# Altium PCB nfc-epd.PcbDoc (part 1 of 2)
Units mil, origin at the board's own origin, x right, y up, seen from the top; angles counter-clockwise.
Board outline 3332.68 x 2086.61 mil, 4 copper layers (Top Layer, Groud Plane, Signal 1, Bottom Layer); 142 components, 114 nets, 463 pads, 109 vias.
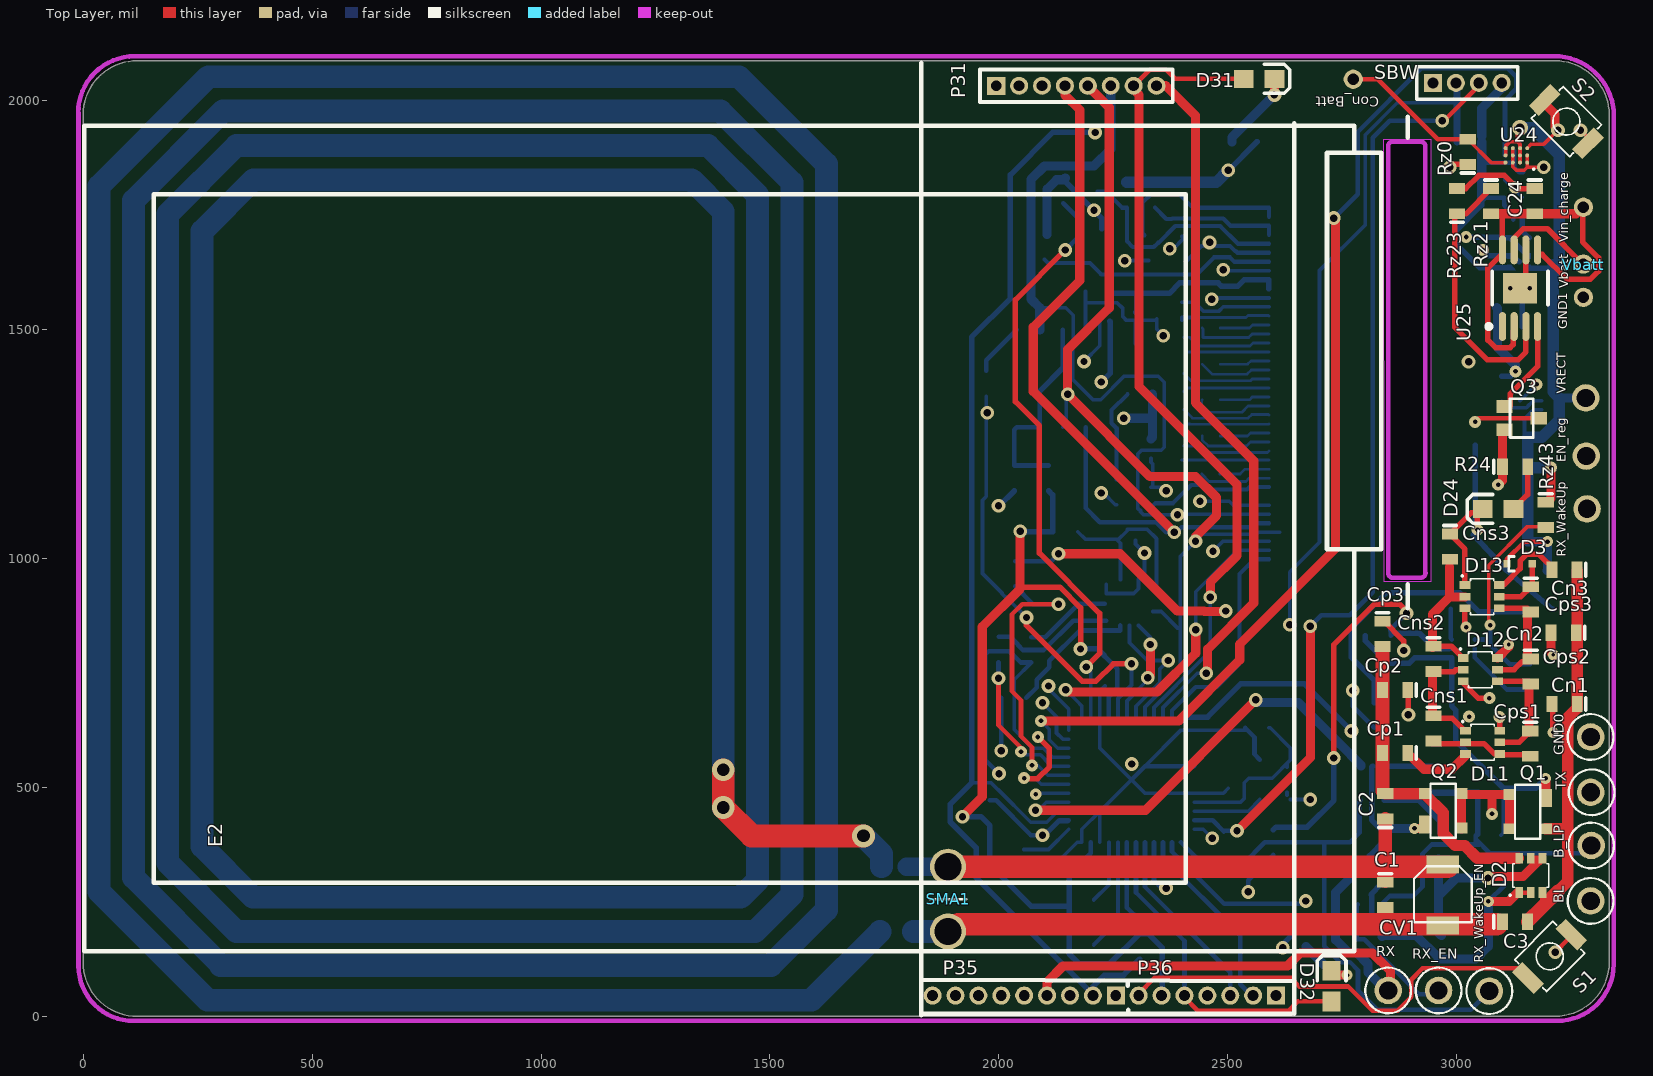
[diagram p0: Top Layer view]
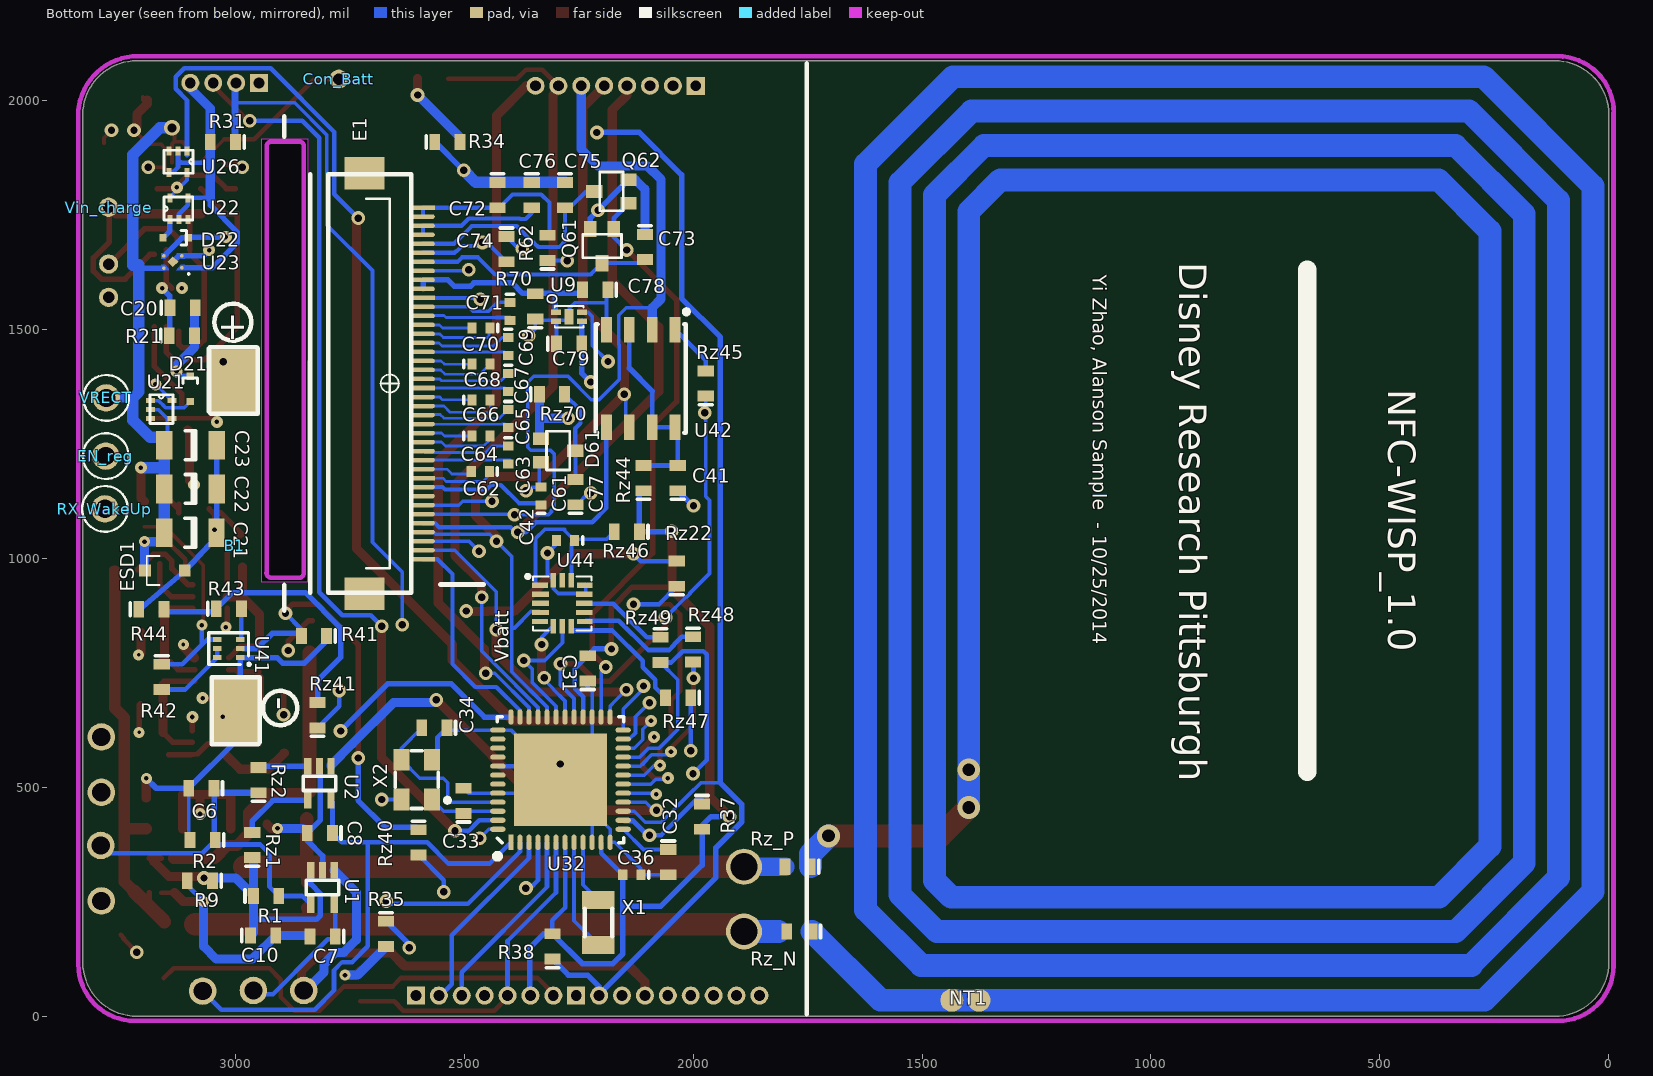
[diagram p1: Bottom Layer view, seen from below]
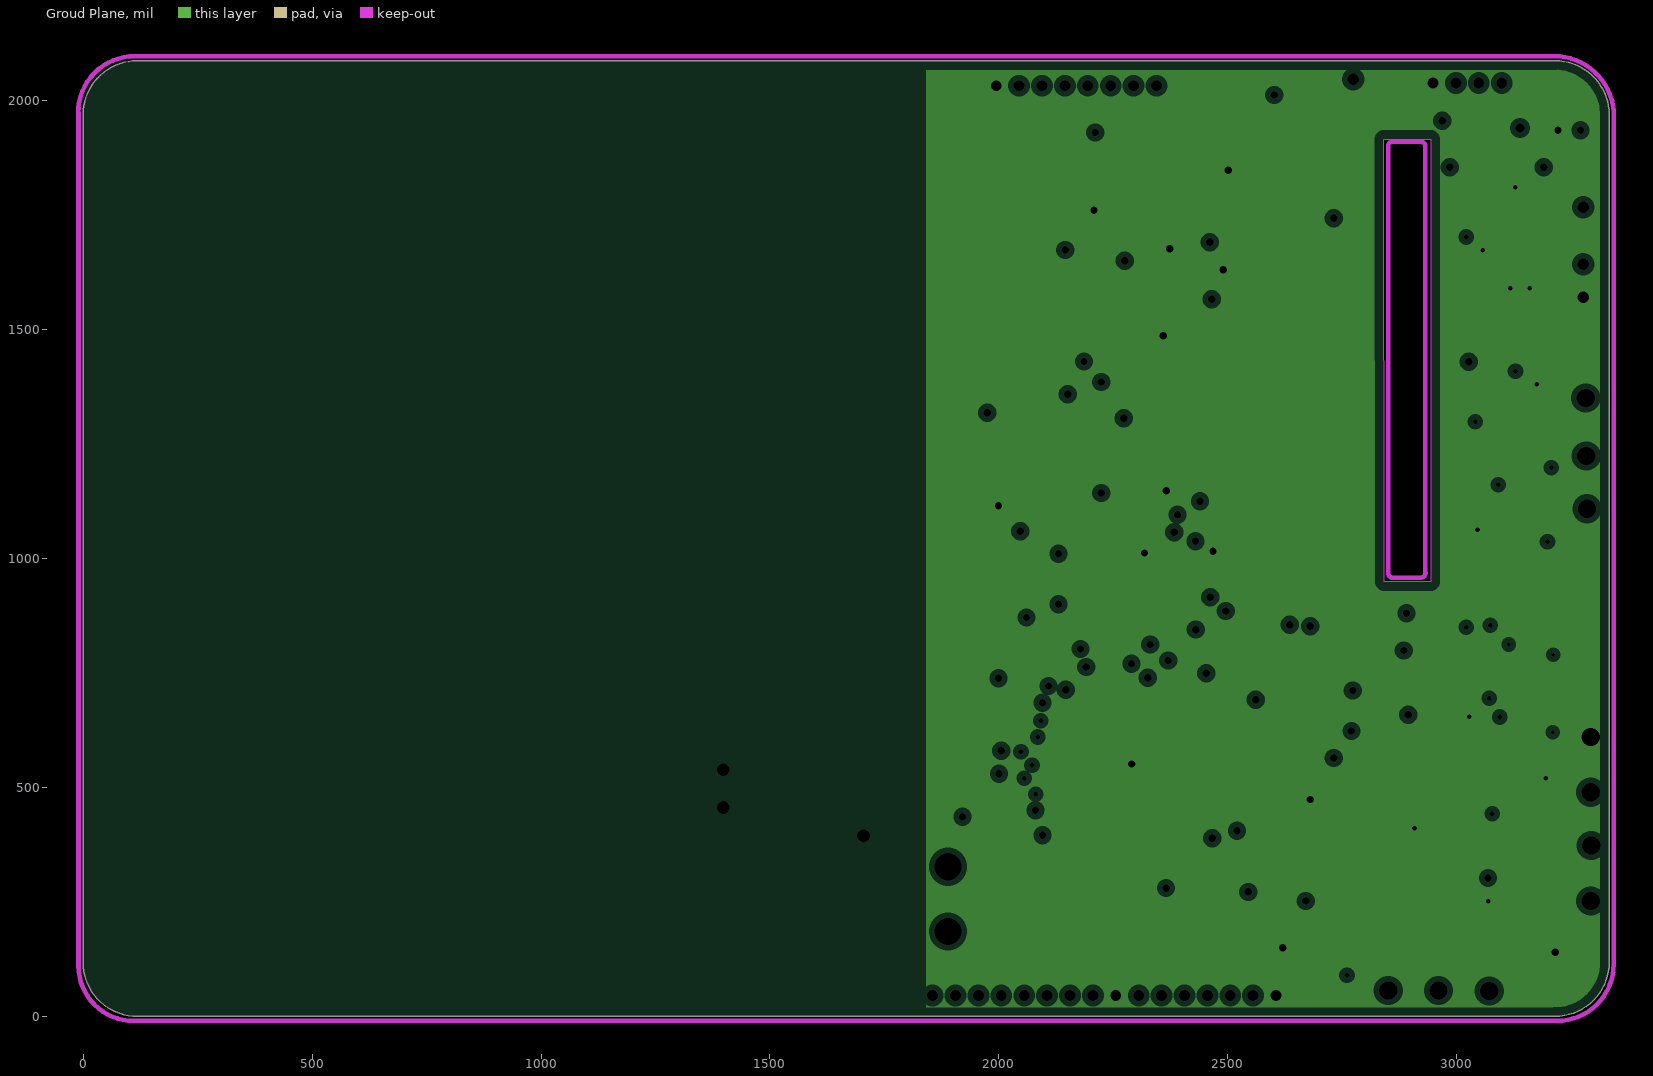
[diagram p2: Groud Plane, clearances drawn from the general rule]
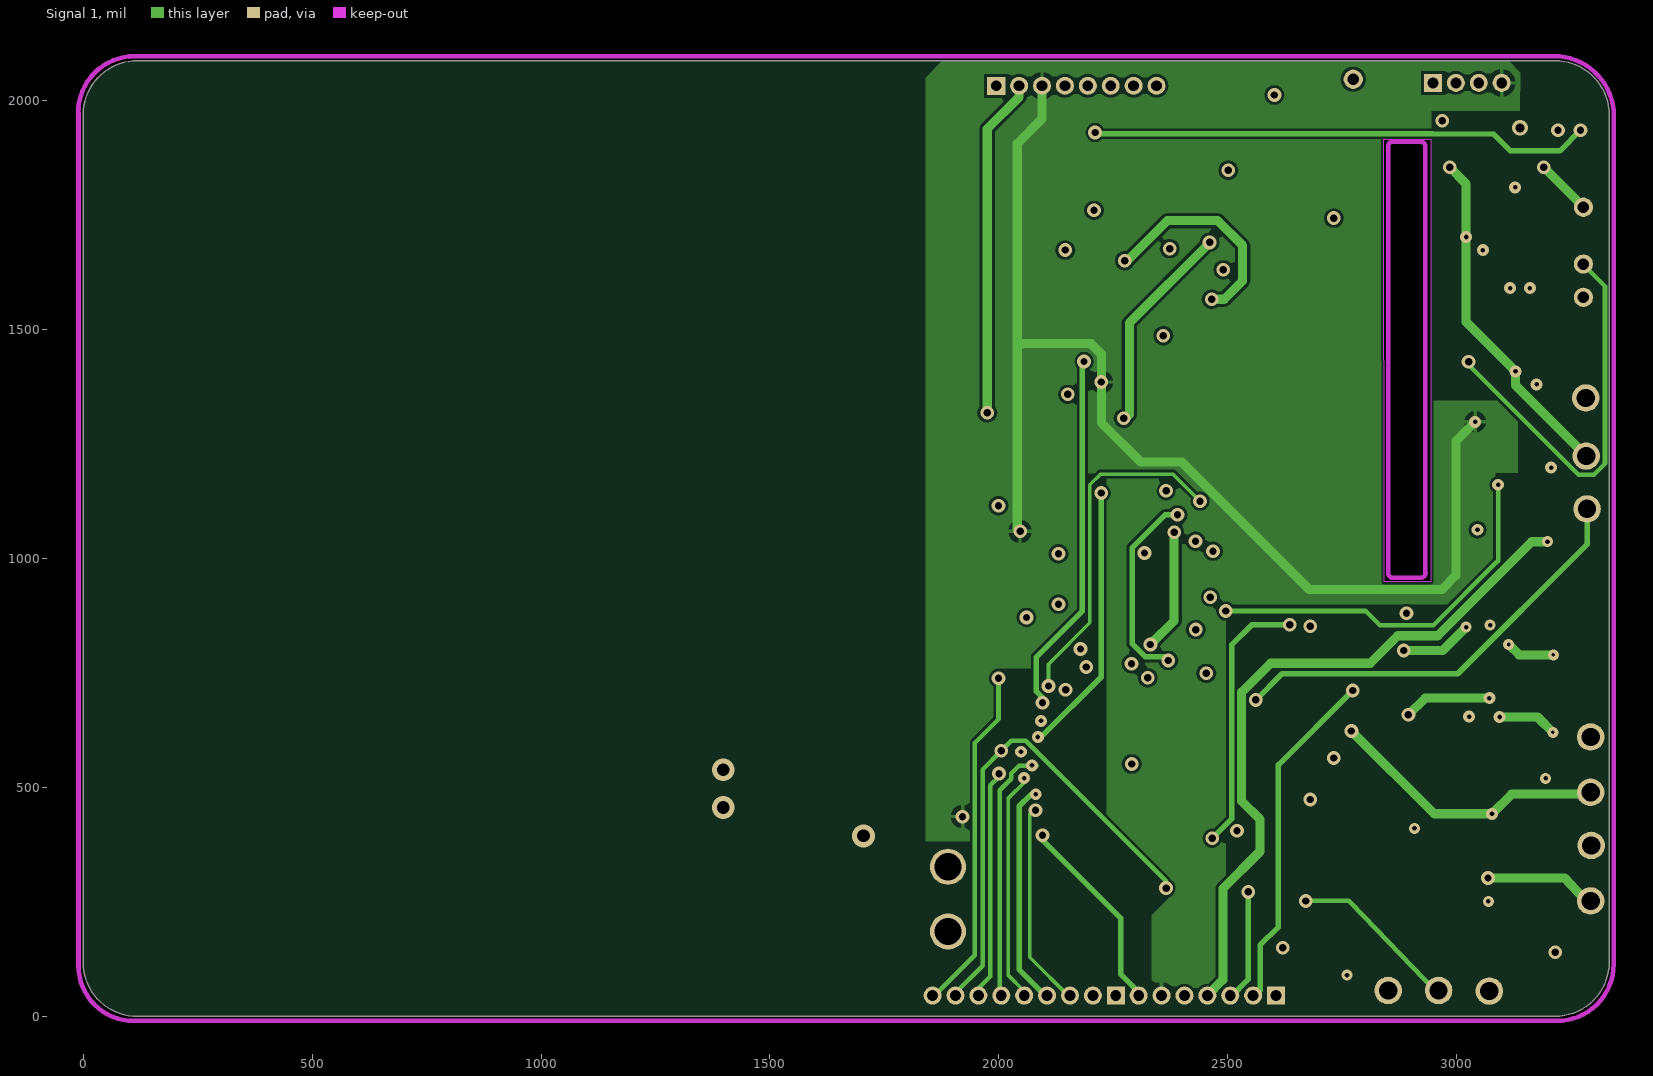
[diagram p3: Signal 1]

## Layer stack, top to bottom
Top Solder: solder mask 0.4, Solder Resist, Dk 3.5
Top Layer: signal copper 1.4
Dielectric1: core 12.6, FR-4, Dk 4.8
Groud Plane: plane copper 1.417, net GND
Dielectric2: prepreg 12.6, FR-4, Dk 4.8
Signal 1: signal copper 1.4
Dielectric3: core 12.6, FR-4, Dk 4.8
Bottom Layer: signal copper 1.4
Bottom Solder: solder mask 0.4, Solder Resist, Dk 3.5

## Board outline
0,118.11 0,1968.5 cw(c118.11,1968.5) 118.11,2086.61 3214.57,2086.61 cw(c3214.57,1968.5) 3332.68,1968.5 3332.68,118.11 cw(c3214.57,118.11) 3214.57,0 118.11,0 cw(c118.11,118.11)
cut-out: 2840.55,1915.35 2942.76,1915.35 2942.76,948.82 2841.55,948.82

## Design rules (kind name [scope] priority, off if disabled: settings)
Clearance "Clearance~Sunstone Circuits" [All] p1: gap=6 // Sunstone Circuits Minimum Clearance Rule (MLB~4&6 Layer Designs)
HoleSize "HoleSize~Sunstone Circuits" [All] p1: absolutevalues=TRUE maxlimit=251 minlimit=8 maxpercent=80.000 minpercent=20.000 // Sunstone Circuits Hole Size Rule (MLB~4&6 Layer Designs)
HoleSize Testpoint [All] p2: absolutevalues=TRUE maxlimit=100 minlimit=1 maxpercent=80.000 minpercent=20.000
HoleSize TestPointUsage [All] p3: absolutevalues=TRUE maxlimit=100 minlimit=1 maxpercent=80.000 minpercent=20.000
MinimumAnnularRing "MinimumAnnularRing~Sunstone Circuits" [All] p1: minimumring=7 // Sunstone Circuits Minimum Annular Ring (MLB~4&6 Layer Designs)
PlaneClearance "PlaneClearance~Sunstone Circuits" [All] p1: clearance=12 // Sunstone Circuits Power Plane Clearance Rule (MLB~4&6 Layer Designs)
PlaneConnect "PlaneConnect~Sunstone Circuits" [All] p1: planeconnectstyle=Relief reliefexpansion=10 reliefentries=4 reliefconductorwidth=8 reliefairgap=10 // Sunstone Circuits Power Plane Connect Rule (MLB~4&6 Layer Designs)
PolygonConnect "PolygonConnect~Sunstone Circuits" [All] p1: connectstyle=Relief reliefconductorwidth=8 reliefentries=4 polygonreliefangle="90 Angle" airgapwidth=10 // Sunstone Circuits Polygon Connect Style (MLB~4&6 Layer Designs)
RoutingVias "RoutingVias~Sunstone Circuits" [All] p1: holewidth=16 width=30 viastyle="Through Hole" minholewidth=8 minwidth=24 maxholewidth=20 maxwidth=40 // Sunstone Circuits Routing Vias Rule (MLB~4&6 Layer Designs)
ShortCircuit "ShortCircuit~Sunstone Circuits" [All] p1: allowed=FALSE // Sunstone Circuits Short Circuit Rule~Do Not Allow (MLB~4&6 Layer Designs)
SolderMaskExpansion "SolderMaskExpansion~Sunstone Circuits" [All] p1: expansion=3 // Sunstone Circuits Solder Mask Expansion Rule (MLB~4&6 Layer Designs)
ViasUnderSMD "ViasUnderSMD~Sunstone Circuits" [All] p1: allowed=FALSE // Sunstone Circuits Vias Under SMD~Do Not Allow (MLB~4&6 Layer Designs)
Width "Width~Sunstone Circuits" [All] p1: maxlimit=100 minlimit=6 preferedwidth=10 // Sunstone Circuits Minimum Width Rule (MLB~4&6 Layer Designs)
26 further rules are at their usual default settings.

## Classes and differential pairs
component class Sensors: C41 C42 R41 R42 R43 R44 Rz40 Rz41 Rz43 Rz44 Rz45 Rz46 Rz47 Rz48 Rz49 U41 U42 U44
component class AFE: B_LP BL C1 C2 C3 C6 C7 C8 C10 Cn1 Cn2 Cn3 Cns1 Cns2 Cns3 Cp1 Cp2 Cp3 Cps1 Cps2 Cps3 CV1 D2 D3 D11 D12 D13 GND0 NT1 Q1 Q2 R1 R2 R9 RX RX_EN RX_WakeUp RX_WakeUp_EN Rz1 Rz2 Rz_N Rz_P SMA1 Tx U1 U2 VRECT
component class Power: B1 C20 C21 C22 C23 C24 Con_Batt D21 D22 D24 EN_reg ESD1 GND1 Q3 R21 R24 Rz0 Rz21 Rz22 Rz23 U21 U22 U23 U24 U25 U26 Vbatt Vin_charge VinCharge
component class "E-ink Diplay": C61 C62 C63 C64 C65 C66 C67 C68 C69 C70 C71 C72 C73 C74 C75 C76 C77 C78 C79 D61 E1 E2 Q61 Q62 R62 R70 Rz70 U9
component class Digital: C31 C32 C33 C34 C36 D31 D32 P31 P35 P36 R31 R34 R35 R37 R38 S1 S2 SBW U32 X1 X2

## Components (designator, comment, footprint, x,y, rotation, side; value= is the part's Value field where it differs from the comment)
B1 "Battery -PGEB0054018" "Battery -PGEB0054018-Pad_only" 3023.62,1805.12 r270 bottom locked
B_LP "Test Point" "Test Point - Small"#1 3293.31,373.03 r0 top locked
BL "Test Point" "Test Point - Small"#1 3292.13,251.97 r0 top locked
C1 "Cap" 0603 2843.5,265 r270 top locked
C2 "Cap" 0603 2843.5,458.66 r90 top locked
C3 "Cap" 0603 3126.97,206.69 r0 top locked
C6 "Cap" 0603 3073.82,498.03 r0 bottom locked
C7 "Cap" 0603 2809.06,174.21 r0 bottom locked
C8 "Cap" 0603 2814.96,400.59 r0 bottom locked
C10 "Cap" 0603 2938.98,176.18 r180 bottom locked
C20 "Cap" 0603 3114.75,1547.24 r180 bottom locked
C21 "Cap" 1206 3097.76,1056.1 r0 bottom locked
C22 "Cap" 1206 3097.44,1151.57 r0 bottom locked
C23 "Cap" 1206 3097.44,1247.05 r0 bottom locked
C24 "Cap" 0603 3170,1780 r270 top locked
C31 "Cap" 0603 2230,760 r90 bottom locked
C32 "Cap" 0603 2054.13,336.61 r270 bottom locked
C33 "Cap" 0603 2500.98,470.47 r90 bottom locked
C34 "Cap" 0603 2564.96,629.92 r0 bottom locked
C36 "Cap" 0402 2133.86,309.06 r0 bottom locked
C41 "Cap" 0603 2033.46,1175.2 r90 bottom locked
C42 "Cap" 0402 2278.54,1039.37 r0 bottom locked
C61 "Cap" 0402 2332.02,1135.83 r90 bottom locked
C62 "Cap" 0402 2464.67,1190 r0 bottom locked
C63 "Cap" 0402 2403.54,1226.12 r270 bottom locked
C64 "Cap" 0402 2463.54,1267.12 r180 bottom locked
C65 "Cap" 0402 2403.54,1305.12 r270 bottom locked
C66 "Cap" 0402 2463.54,1346.12 r180 bottom locked
C67 "Cap" 0402 2403.54,1384.12 r270 bottom locked
C68 "Cap" 0402 2463.54,1424.12 r180 bottom locked
C69 "Cap" 0402 2403.54,1463.12 r270 bottom locked
C70 "Cap" 0402 2463.54,1503.12 r0 bottom locked
C71 "Cap" 0402 2399.61,1539.37 r270 bottom locked
C72 "Cap" 0603 2427.17,1793.31 r270 bottom locked
C73 "Cap" 0603 2105.12,1680 r270 bottom locked
C74 "Cap" 0603 2407.48,1675.2 r270 bottom locked
C75 "Cap" 0603 2279.53,1793.31 r270 bottom locked
C76 "Cap" 0603 2352.36,1793.31 r270 bottom locked
C77 "Cap" 0603 2256.89,1144.69 r90 bottom locked
C78 "Cap" 0603 2213.58,1586.61 r0 bottom locked
C79 "Cap" 0603 2270.67,1468.5 r180 bottom locked
Cn1 "Cap" 0603 3235.24,682.09 r180 top locked
Cn2 "Cap" 0603 3233.19,837.6 r180 top locked
Cn3 "Cap" 0603 3235,975 r180 top locked
Cns1 "Cap" 0603 2948.82,628.94 r270 top locked
Cns2 "Cap" 0603 2948.82,780.51 r270 top locked
Cns3 "Cap" 0603 2984.83,1025.59 r270 top locked
Con_Batt "Test Point" "Test Point - Super Small"#1 2773.62,2046.26 r180 bottom locked
Cp1 "Cap" 0603 2865.16,574.8 r180 top locked
Cp2 "Cap" 0603 2865.16,712.6 r180 top locked
Cp3 "Cap" 0603 2837.6,835 r270 top locked
Cps1 "Cap" 0603 3160.43,595.47 r270 top locked
Cps2 "Cap" 0603 3161.42,752.95 r270 top locked
Cps3 "Cap" 0603 3161.42,910.43 r270 top locked
CV1 "GKY40056" "Var-Cap - GKY40056" 2969.49,264.76 r90 top
D2 "BAS70BRW" SOT-363 3161.42,307.62 r90 top locked
D3 "RB751S40T1" SOD-523 3136.81,988.19 r90 top locked
D11 "BAS70DW-04" SOT-363 3056.1,598.43 r0 top locked
D12 "BAS70DW-04" SOT-363 3051.18,756.89 r0 top locked
D13 "BAS70DW-04" SOT-363 3055.12,916.34 r0 top locked
D21 "RB751S40T1" SOD-523 3097.83,1370 r180 bottom locked
D22 "RB751S40T1" SOD-523 3130,1700 r270 bottom locked
D24 "LED" "Diode - 0603" 3090,1108.06 r0 top locked
D31 "LED" "DIODE - 0603" 2567.91,2047.24 r180 top locked
D32 "LED" "DIODE - 0603" 2726.38,65.94 r270 top locked
D61 "BAT54SW" "SOT-323 / SC-70" 2294.62,1235.24 r270 bottom locked
E1 "EPD - Connector" "EPD - Connector" 2662.4,1381.89 r0 bottom locked
E2 "EPD - 2.7\"" "EPD - EM027AS012" 3198.82,1381.89 r180 top locked
EN_reg "Test Point" "Test Point - Small"#1 3282.48,1223.43 r90 bottom locked
ESD1 "MM3Z5V6B" SOD-323 3153.54,973.43 r90 bottom locked
GND0 "GND" "Test Point - Small"#1 3292.13,610 r0 top locked
GND1 "GND" "Test Point - Super Small"#1 3276.28,1570 r90 top locked
NT1 "PCB Coil" "Net Tie - 50mil" 1404.91,35 r0 bottom locked net-tie
P31 "MHDR1X8" MHDR1X8 1994.09,2032.01 r0 top locked
P35 "MHDR1X9" MHDR1X9 2255.12,45.34 r180 top locked
P36 "MHDR1X7" MHDR1X7 2605.12,45.34 r180 top locked
Q1 "BF1105R" SOT-143R 3154.53,446.85 r90 top locked
Q2 "BF1105R" SOT-143R 2970,448.82 r270 top locked
Q3 "NMOS" "SOT-323 / SC-70" 3141.33,1306.1 r270 top locked
Q61 "2N7002KW" "SOT-323 / SC-70" 2198.82,1682.09 r0 bottom locked
Q62 "2N7002KW" "SOT-323 / SC-70" 2178.15,1801.18 r90 bottom locked
R1 "Res" 0603 2932.09,262.8 r180 bottom locked
R2 "Res" 0603 3070.87,385 r0 bottom locked
R9 "Res" 0603 3076.77,296.26 r0 bottom locked
R21 "Res" 0603 3116.23,1486.22 r180 bottom locked
R24 "Res" 0603 3127.03,1200 r0 top locked
R31 "Res" 0603 3026.57,1909.45 r0 bottom locked
R34 "Res" 0603 2536.42,1909.45 r180 bottom locked
R35 "Res" 0603 2670.28,180.12 r270 bottom locked
R37 "Res" 0603 1980.31,436.02 r270 bottom locked
R38 "Res" 0603 2307.09,152.56 r90 bottom locked
R41 "Res" 0603 2827.76,830.71 r0 bottom locked
R42 "Res" 0603 3160.43,741.14 r270 bottom locked
R43 "Res" 0603 3013.78,889.76 r180 bottom locked
R44 "Res" 0603 3183.07,888.78 r180 bottom locked
R62 "Res" 0603 2317.91,1678.15 r90 bottom locked
R70 "Res" 0603 2344.49,1550.2 r90 bottom locked
RX "Test Point" "Test Point - Small"#1 2850,56.4 r0 top locked
RX_EN "Test Point" "Test Point - Small"#1 2960,56.4 r0 top locked
RX_WakeUp "Test Point" "Test Point - Small"#1 3284.21,1108.06 r0 bottom locked (schematic designator T6)
RX_WakeUp_EN "Test Point" "Test Point - Small"#1 3070.87,55.12 r0 top locked
Rz0 "Res" 0603 3023.62,1887.8 r90 top locked
Rz1 "Res" 0603 2962.6,374.02 r90 bottom locked
Rz2 "Res" 0603 2948.82,515.75 r90 bottom locked
Rz21 "Res" 0603 3074.72,1780 r270 top locked
Rz22 "Res" 0603 2035.43,966.54 r90 bottom locked
Rz23 "Res" 0603 3000,1780 r90 top locked
Rz40 "Res" 0603 2599.41,379.92 r270 bottom locked
Rz41 "Res" 0603 2819.88,657.48 r90 bottom locked
Rz43 "Res" 0603 3193.9,1095 r270 top locked
Rz44 "Res" 0603 2108.27,1175.2 r90 bottom locked
Rz45 "Res" 0603 1972.44,1381.89 r90 bottom locked
Rz46 "Res" 0603 2144.69,1058.07 r0 bottom locked
Rz47 "Res" 0603 2032.48,695.87 r0 bottom locked
Rz48 "Res" 0603 2000,801.18 r270 bottom locked
Rz49 "Res" 0603 2070.87,800.2 r270 bottom locked
Rz70 "Res" 0603 2308.07,1358.27 r180 bottom locked
Rz_N "Res" 0603 1768.03,185.2 r0 bottom locked
Rz_P "Res" 0603 1771.45,326.61 r0 bottom locked
S1 "Switch - Generic SPST" "SWITCH - B3U-1000P" 3202.76,130.91 r45 top locked
S2 "Switch - Generic SPST" "SWITCH - B3U-1000P" 3239.17,1953.74 r135 top locked
SBW "MHDR1X4" MHDR1X4 2947.83,2038.39 r0 top locked
SMA1 "SMA - Hole - 2 Pin" "SMA - Hole - 2 Pin" 1888.78,255.91 r0 top locked
TX "Test Point" "Test Point - Small"#2 3294.29,489.17 r0 top locked (schematic designator T9)
U1 "NCS2200" SC70-5 2809.06,281.5 r0 bottom locked
U2 "MAX9119" SC70-5 2815.94,508.86 r0 bottom locked
U9 "SiP32431" TDFN-4 2270.67,1527.56 r270 bottom locked
U21 "BU4942FVE" VSOF5/SOT665 3185.04,1344.49 r180 bottom locked
U22 "BU4919FVE" VSOF5/SOT665 3142.54,1740 r90 bottom locked
U23 "NCP4682DMU25TCG" 4-UDFN 3135.91,1647.64 r90 bottom locked
U24 "SIP32102DB" WCSP-12 3130,1880 r180 top locked
U25 "LTC4071EMS8E#PBF" LT-MS8E-8-1880X1680TP_N 3137.87,1590 r90 top locked
U26 "BU4923FVE" VSOF5/SOT665 3105,1890 r270 bottom locked
U32 "MSP430F5310" 48-QFN 2289.37,516.73 r90 bottom locked
U41 "SI1016X" "SC-89-6 Vishay" 3013.78,803.15 r0 bottom locked
U42 "FM25Vxx" TDFN-8 2114.17,1392.72 r0 bottom locked
U44 "ADXL362" "ADXL362 - Mod 6mil clearence" 2285.43,901.57 r180 bottom locked
Vbatt "Vbatt" "Test Point - Super Small"#2 3269.35,1481.3 r90 top locked
Vin_charge "Test Point" "Test Point - Super Small"#3 3274.61,1766.73 r90 bottom locked
VRECT "Test Point" "Test Point - Small"#1 3281.5,1350.39 r90 bottom locked
X1 "XTAL" "XTAL - 2PIN [3.2MM X 1.5MM]" 2206.69,204.72 r90 bottom locked
X2 "XTAL 4pin" "XTAL - 4Pin [3.2MM X 2.5MM]" 2603.35,516.73 r90 bottom locked

## Footprints (in the part's own frame and the unit in brackets; to place one, negate y for a bottom-side part, rotate by r counter-clockwise, add the part's x,y. Pads: shape width x height; smd on the part's side, far side on the other; paste and mask are expansions set on the pad)
4-UDFN [mm] "DFN, 4-Leads, Body 1.00x1.00mm, Pitch 0.65mm, IPC Medium Density"
  round 0.2 smd mask+0: 1(-0.325,-0.5) 2(0.325,-0.5) 3(0.325,0.5) 4(-0.35,0.5)
  rect 0.43x0.43 smd rot 45: 5(0,0)
  Top Layer region: 0.175,-0.425 0.375,-0.225 0.475,-0.225 0.475,-0.65 0.175,-0.65
  Top Layer region: -0.175,0.425 -0.375,0.225 -0.475,0.225 -0.475,0.65 -0.175,0.65
  Top Layer region: 0.475,0.65 0.175,0.65 0.175,0.425 0.375,0.225 0.475,0.225
  Top Layer region: -0.475,-0.65 -0.475,-0.2 -0.175,-0.425 -0.175,-0.65
  silkscreen extent -0.72,-0.92 -0.63,-0.82, body extent -0.53,-0.53 0.53,0.53, height 0.6
48-QFN [mm]
  rect 5.15x5.15 smd: 0(0,0)
  rect 0.85x0.28 smd: 1(-3.475,2.75)
  oval 0.85x0.28 smd: 2(-3.475,2.25) 3(-3.475,1.75) 4(-3.475,1.25) 5(-3.475,0.75) 6(-3.475,0.25) 7(-3.475,-0.25) 8(-3.475,-0.75) 9(-3.475,-1.25) 10(-3.475,-1.75) 11(-3.475,-2.25) 12(-3.475,-2.75) 25(3.475,-2.75) 26(3.475,-2.25) 27(3.475,-1.75) 28(3.475,-1.25) 29(3.475,-0.75) 30(3.475,-0.25) 31(3.475,0.25) 32(3.475,0.75) 33(3.475,1.25) 34(3.475,1.75) 35(3.475,2.25) 36(3.475,2.75)
  oval 0.28x0.85 smd: 13(-2.75,-3.475) 14(-2.25,-3.475) 15(-1.75,-3.475) 16(-1.25,-3.475) 17(-0.75,-3.475) 18(-0.25,-3.475) 19(0.25,-3.475) 20(0.75,-3.475) 21(1.25,-3.475) 22(1.75,-3.475) 23(2.25,-3.475) 24(2.75,-3.475) 37(2.75,3.475) 38(2.25,3.475) 39(1.75,3.475) 40(1.25,3.475) 41(0.75,3.475) 42(0.25,3.475) 43(-0.25,3.475) 44(-0.75,3.475) 45(-1.25,3.475) 46(-1.75,3.475) 47(-2.25,3.475) 48(-2.75,3.475)
  silkscreen extent -4.4,-3.5 3.5,3.65, body extent -3.5,-3.5 3.5,3.5, height 1
0402 [mm] "Surface Mount; Body 1 x 0.5 mm (LxW typ)"
  rect 0.5x0.6 smd: 1(-0.5,0) 2(0.5,0)
  silkscreen extent -0.95,-0.2 -0.95,0.2, body extent -0.5,-0.25 0.5,0.25, height 0.5
0603 [mm] "Surface Mount; Body 1.6 x 0.8 mm (LxW typ)"
  rect 0.6x0.9 smd: 1(-0.7,0) 2(0.7,0)
  silkscreen extent -1.17,-0.35 -1.17,0.35, body extent -0.8,-0.4 0.8,0.4, height 0.8
1206 [mm] "Surface Mount; Body 3.2 x 1.6 mm (LxW typ)"
  rect 0.9x1.6 smd: 1(-1.45,0) 2(1.45,0)
  silkscreen extent -0.3,-0.8 0.3,0.8, body extent -1.6,-0.8 1.6,0.8, height 1.1
"ADXL362 - Mod 6mil clearence" [mm] "3D ACCEL DIG LO PWR 3AX 16LGA"
  rect 0.869x0.3 smd: 1(-1.24,1) 5(-1.24,-1) 9(1.24,-1) 13(1.24,1)
  rect 0.925x0.3 smd: 2(-1.212,0.5) 3(-1.212,0) 4(-1.212,-0.5) 10(1.212,-0.5) 11(1.212,0) 12(1.212,0.5)
  rect 0.3x0.8 smd: 6(-0.5,-1.275) 7(0,-1.275) 8(0.5,-1.275) 14(0.5,1.275) 15(0,1.275) 16(-0.5,1.275)
  silkscreen extent -2.02,-1.5 1.63,1.6, body extent -1.63,-1.5 1.63,1.5, height 1.4
"Battery -PGEB0054018-Pad_only" [mm] "Thin-Film Battery - 25.4 x 25.4 x 0.170mm"
  rect 3.5x2.5 smd: 1(10.625,0.525) 2(28.875,0.65)
  silkscreen extent 6.32,-0.85 30.75,4.05
"Diode - 0603" [mm] "Diode: Body 1.6 x 0.8 mm (LxW typ)"
  rect 1.1x1 smd: 1(0.85,0) 2(-0.85,0)
  silkscreen extent -1.7,-0.8 -0.3,0.8, body extent -0.8,-0.4 0.8,0.4, height 0.8
"DIODE - 0603" [mm] "Diode: Body 1.6 x 0.8 mm (LxW typ)"
  rect 1.1x1 smd: 1(0.85,0) 2(-0.85,0)
  silkscreen extent -1.7,-0.8 -0.3,0.8, body extent -0.8,-0.4 0.8,0.4, height 0.8
"EPD - Connector" [mm] "CONN FPC/FFC 40POS .5MM HORZ SMD, ZIF"
  rect 2.2x1.8 smd: 0(1.4,-11.65) 0(1.4,11.65)
  rect 1.3x0.25 smd: 1(-1.85,9.75) 10(-1.85,5.25) 20(-1.85,0.25) 30(-1.85,-4.75) 40(-1.85,-9.75)
  oval 1.3x0.25 smd: 2(-1.85,9.25) 3(-1.85,8.75) 4(-1.85,8.25) 5(-1.85,7.75) 6(-1.85,7.25) 7(-1.85,6.75) 8(-1.85,6.25) 9(-1.85,5.75) 11(-1.85,4.75) 12(-1.85,4.25) 13(-1.85,3.75) 14(-1.85,3.25) 15(-1.85,2.75) 16(-1.85,2.25) 17(-1.85,1.75) 18(-1.85,1.25) 19(-1.85,0.75) 21(-1.85,-0.25) 22(-1.85,-0.75) 23(-1.85,-1.25) 24(-1.85,-1.75) 25(-1.85,-2.25) 26(-1.85,-2.75) 27(-1.85,-3.25) 28(-1.85,-3.75) 29(-1.85,-4.25) 31(-1.85,-5.25) 32(-1.85,-5.75) 33(-1.85,-6.25) 34(-1.85,-6.75) 35(-1.85,-7.25) 36(-1.85,-7.75) 37(-1.85,-8.25) 38(-1.85,-8.75) 39(-1.85,-9.25)
  silkscreen extent -1.2,-11.6 4.4,11.6, body extent -1.2,-11.6 4.4,11.6, height 2
"EPD - EM027AS012" [mil] "2.7'' TFT EPD Panel, with mating for STARCONN 089H40 Conncetor"
  silkscreen extent 364,-563 3196,1240
LT-MS8E-8-1880X1680TP_N [mm] "SOP, 8-Leads, Body 3.1x3.1mm, Pitch 0.65mm, Thermal Pad 1.88x1.68mm, IPC Medium Density"
  oval 1.6x0.4 smd: 1(-2.125,0.975) 2(-2.125,0.325) 3(-2.125,-0.325) 4(-2.125,-0.975) 5(2.125,-0.975) 6(2.125,-0.325) 7(2.125,0.325) 8(2.125,0.975)
  rect 1.68x1.88 smd mask+0.076: 9(0,0)
  silkscreen extent -2.25,-1.55 0.92,1.85, body extent -1.55,-1.55 1.55,1.55, height 1.1
MHDR1X4 [mm] "Connector; Header; 4 Position"
  rect 1x1 hole 0.6: 1(0,0)
  round 1 hole 0.6: 2(1.27,0) 3(2.54,0) 4(3.81,0)
  silkscreen extent -0.9,-0.9 4.71,0.9
MHDR1X7 [mm] "Connector; Header; 7 Position"
  rect 1x1 hole 0.6: 1(0,0)
  round 1 hole 0.6: 2(1.27,0) 3(2.54,0) 4(3.81,0) 5(5.08,0) 6(6.35,0) 7(7.62,0)
MHDR1X8 [mm] "Connector; Header; 8 Position"
  rect 1x1 hole 0.6: 1(0,0)
  round 1 hole 0.6: 2(1.27,0) 3(2.54,0) 4(3.81,0) 5(5.08,0) 6(6.35,0) 7(7.62,0) 8(8.89,0)
  silkscreen extent -0.9,-0.9 9.79,0.9
MHDR1X9 [mm] "Connector; Header; 9 Position"
  rect 1x1 hole 0.6: 1(0,0)
  round 1 hole 0.6: 2(1.27,0) 3(2.54,0) 4(3.81,0) 5(5.08,0) 6(6.35,0) 7(7.62,0) 8(8.89,0) 9(10.16,0)
"Net Tie - 50mil" [mil] "Net Tie is used to connect two differnt nets together"
  round 50 smd: 1(-29.53,0) 2(30,0)
  Top Layer lines w50: -30,0 30,0
SC70-5 [mm] "SC70-5"
  rect 0.4x0.92 smd: 1(-0.65,-0.95) 2(0,-0.95) 3(0.65,-0.95) 4(0.65,0.95) 5(-0.65,0.95)
  silkscreen extent -0.9,-0.4 0.9,0.4, body extent -0.9,-0.4 0.9,0.4, height 1.1
"SC-89-6 Vishay" [mm]
  rect 0.478x0.3 smd: 1(-0.638,0.5) 2(-0.638,0) 3(-0.638,-0.5) 4(0.638,-0.5) 5(0.638,0) 6(0.638,0.5)
  silkscreen extent -1.15,-0.87 1.11,0.91
"SMA - Hole - 2 Pin" [mm] "SMA port for wisp"
  round 2 hole 1.5: 1(0,1.796) 2(0,-1.796)
  silkscreen extent -1.02,0 1.02,0
SOD-323 [mm] "SOD-322 Footprint"
  rect 0.65x0.65 smd: 1(0,-1.1) 2(0,1.1)
  silkscreen extent -0.8,0.3 0.8,1, body extent -0.7,-0.9 0.7,0.9, height 1
SOD-523 [mm] "SOD-523 Footprint"
  rect 0.4x0.4 smd: 1(0,-0.7) 2(0,0.7)
  silkscreen extent -0.4,0.3 0.4,0.6, body extent -0.4,-0.6 0.4,0.6, height 1
SOT-143R [mm] "SOT-143R for BF1105R"
  rect 1x0.7 smd: 1(0.75,-1)
  rect 0.6x0.7 smd: 2(-0.95,-1) 3(-0.95,1) 4(0.95,1)
  silkscreen extent -1.5,-0.7 1.5,0.7, body extent -1.5,-0.7 1.5,0.7, height 1.1
"SOT-323 / SC-70" [mm] "SOT-323 / SC-70; 3 Lead Package"
  rect 0.7x0.9 smd: 1(-0.65,-0.95) 2(0.65,-0.95) 3(0,0.95)
  silkscreen extent -1.07,-0.65 1.07,0.65, body extent -1.07,-0.65 1.07,0.65, height 1
SOT-363 [mm] "SOT-363 ,SC-88 ,6 Lead"
  rect 0.6x0.42 smd: 1(-0.95,0.65) 2(-0.95,0) 3(-0.95,-0.65) 4(0.95,-0.65) 5(0.95,0) 6(0.95,0.65)
  silkscreen extent -1.15,-1 0.65,1.2, body extent -0.65,-1 0.65,1, height 1
"SWITCH - B3U-1000P" [mm] "Top Push Button Switch, OMRON, SPST-NO, Off-Mom, 0.05A 12V"
  rect 0.8x1.7 smd: 1(-1.7,0) 2(1.7,0)
  silkscreen extent -1.5,-1.25 1.5,1.25, body extent -1.5,-1.25 1.5,1.25, height 1.6
TDFN-4 [mm] "TDFN4 1.2 x 1.6"
  rect 0.3x0.55 smd: 1(-0.25,-0.725) 2(0.25,-0.725) 3(0.25,0.725) 4(-0.25,0.725)
  rect 0.86x0.5 smd: 5(0,0)
  silkscreen extent -0.6,-0.8 0.6,0.8, body extent -0.6,-0.8 0.6,0.8, height 0.55
TDFN-8 [mm] "FM25V20 - 2Mb SPI F-RAM"
  rect 0.6x1.4 smd: 1(-1.905,-2.7) 2(-0.635,-2.7) 3(0.635,-2.7) 4(1.905,-2.7) 5(1.905,2.7) 6(0.635,2.7) 7(-0.635,2.7) 8(-1.905,2.7)
  silkscreen extent -2.65,-3.83 2.5,3, body extent -2.5,-3 2.5,3, height 0.75
"Test Point - Small"#1 [mil] "Test Point, 40mil hole, example DK: 5000K-ND"
  round 60 hole 40: 0(0,0)
  silkscreen extent -50,-50 50,50
"Test Point - Small"#2 [mil] "Test Point, 40mil hole, example DK: 5000K-ND"
  round 60 hole 40: 0(-2.17,0)
  silkscreen extent -50,-50 50,50
"Test Point - Super Small"#1 [mil] "25 - 42"
  round 42 hole 25: 0(0,0)
"Test Point - Super Small"#2 [mil] "25 - 42"
  round 42 hole 25: 0(161.42,-6.93)
"Test Point - Super Small"#3 [mil] "25 - 42"
  round 42 hole 25: 0(0,1.67)
"Var-Cap - GKY40056" [mm] "CAP TRIMMER 8-40PF 50V SMD - GKY40056 - Sprague-Goodman"
  rect 1x1.8 smd: 1(1.695,0) 2(-1.695,0)
  silkscreen extent -1.5,-1.6 1.6,1.6, body extent -1.5,-1.6 1.6,1.6, height 1.4
VSOF5/SOT665 [mm] "BU49xxFVE"
  rect 0.5x0.28 smd: 1(0,0) 2(0,-0.5) 3(0,-1) 4(1.2,-1) 5(1.2,0)
  silkscreen extent -0.03,-1.28 1.25,0.33, body extent 0.03,-1.22 1.2,0.28, height 0.6
WCSP-12 [mm] "WCSP-12(BGA), 12-Leads, Body 1.71x1.31mmx0.55mm, Pitch 0.40mm"
  round 0.22 smd: A1(-0.6,0.4) A2(-0.2,0.4) A3(0.2,0.4) A4(0.6,0.4) B1(-0.6,0) B2(-0.2,0) B3(0.2,0) B4(0.6,0) C1(-0.6,-0.4) C2(-0.2,-0.4) C3(0.2,-0.4) C4(0.6,-0.4)
  silkscreen extent -1.01,0.71 -0.91,0.81, body extent -0.85,-0.65 0.86,0.65, height 0.55
"XTAL - 2PIN [3.2MM X 1.5MM]" [mm] "FC-135   crystal - epson eletronics"
  rect 1x1.8 smd: 1(-1.25,0) 2(1.25,0)
  silkscreen extent -0.76,-0.76 0.76,0.76, body extent -1.6,-0.75 1.6,0.75, height 0.8
"XTAL - 4Pin [3.2MM X 2.5MM]" [mm] "CRYSTAL, 3.2mm x 2.5mm,  4Pin"
  rect 1.2x0.9 smd: 1(-1.1,-0.85) 2(1.1,-0.85) 3(1.1,0.85) 4(-1.1,0.85)
  silkscreen extent -1.6,-1.83 1.6,1.2, body extent -1.6,-1.2 1.6,1.2, height 1

## Part data
B1: library part "Battery - MEC201", "ThinFilm solid state battery  - 4.1V 1.0MAH"
B_LP BL Con_Batt EN_reg RX RX_EN RX_WakeUp RX_WakeUp_EN TX Vin_charge VRECT: "Test Point, large or small foot prints"
C1 C2 C3 C6 C7 C8 C10 C20 C21 C22 C23 C24 C31 C32 C33 C34 C36 C41 C42 C61 C62 C63 C64 C65 C66 C67 C68 C69 C70 C71 C72 C73 C74 C75 C76 C77 C78 C79 Cn1 Cn2 Cn3 Cns1 Cns2 Cns3 Cp1 Cp2 Cp3 Cps1 Cps2 Cps3: "Ceramic Capacitor (Surface Mount)"
CV1: library part Var-Cap/603, "Var-Cap Sprague-Goodman GKY40056"
D2: library part "Diode - Array_2", "Diode Array - 2 Pair Series Connection"
D3 D21 D22: "Schottky Diode"
D11 D12 D13: library part "Diode - Array_2_1", "Diode Array - 2 Pair Series Connection"
D24 D31 D32: library part "Diode - LED", "Typical RED, GREEN, YELLOW, AMBER GaAs LED"
D61: library part "Diode - Array_1", "Diode Array, Two in Series, Small Package SOT-323"
E1: "FPC, 40pin, 0.5mm Pitch - ZIF"
E2: library part "EPD - Display EM027AS012", "2.7\" TFT EPD Panel, STARCONN 089H40 variant"
ESD1: library part MM3Z4V3B, "Vz=5.6V, Overvoltage Protection Zener"
GND0 GND1 Vbatt: library part "Test Point", "Test Point, large or small foot prints"
NT1: library part "Net Tie - Coil", "Hand draw coil symbol based on a 'Net Tie'"
P31: "Header, 8-Pin"
P35: "Header, 9-Pin"
P36: "Header, 7-Pin"
Q1 Q2: "SOT-143R, N-Channel Dual-Gate Mos-Fets MOSFET"
Q3 Q61 Q62: library part MOSFET-N, "N-Channel MOSFET"
R1 R2 R9 R21 R24 R31 R34 R35 R37 R38 R41 R42 R43 R44 R62 R70 Rz0 Rz1 Rz2 Rz21 Rz22 Rz23 Rz40 Rz41 Rz43 Rz44 Rz45 Rz46 Rz47 Rz48 Rz49 Rz70 Rz_N Rz_P: "Chip Resistor (Surface Mount)"
S1 S2: "Generic Single-Pole, Single-Throw Switch"
SBW: "Header, 4-Pin"
SMA1: "Two pin SMA connector wisp"
U1: "Comparator: On Semi 10uA Comparator"
U2: "IC COMPARATOR BTR SC70-5, 350nA"
U9: "High Sside Switch - 4TDFN package"
U21 U22 U26: library part BU49xxFVE, "VSOF-5,Supervisor"
U23: "Regulator: LDO  NCP4682 (with enable), 4-UDFN package"
U24: "Bi-directional Load Switch"
U25: "Li-Ion / Polymer Shunt Battery Charger System with Low Battery Disconnect, 8-pin SOP (MS8E-8), -40 to 125 degC, Pb-Free"
U32: library part "MSP430F5310 - 48Pin", "MSP430 - 48LQFP or 48QFN"
U41: "NMOS and PMOS array"
U42: library part FM25V20, "? Mbit FRAM SPI"
U44: "3D ACCEL DIG LO PWR 16LGA"
X1: library part "XTAL 2-pins", "Crystal - 2-Pin Surface Mount"
X2: library part "XTAL 4-pins", "Crystal - 4-Pin Surface Mount"

## Via types
v1: diameter 30, hole 16, Top Layer to Bottom Layer, tented both sides, 74 vias
v2: diameter 26, hole 10, Top Layer to Bottom Layer, tented both sides, 21 vias
v3: diameter 24, hole 10, Top Layer to Bottom Layer, tented both sides, 7 vias
v4: diameter 24, hole 8, Top Layer to Bottom Layer, tented both sides, 3 vias
v5: diameter 50, hole 28, Top Layer to Bottom Layer, tented both sides, 3 vias
v6: diameter 34, hole 20, Top Layer to Bottom Layer, tented both sides, 1 vias

## Nets (pads, with @x,y where several pads share a name; then routed paths per layer and width w, separated by ;. In a path a pad name is that pad's centre, name@x,y a point inside that pad or via, vN(x,y) a via of type N, cw(c..) or ccw(c..) an arc to the next point about the centre after c; other vN are vias at no path point)
ACCEL_INT1: P35.7 Rz49.2 U32.21 | length 1199.6
  Signal 1 w10: P35.7@1955.12,41.34 1955.12,60.84 1981.3,87.02 1981.3,504.85 2000,523.55 v1(2000,530)
  Bottom Layer w8: Rz49.2@2070.87,772.64 2033.46,735.24 2033.46,626.46 2074.9,585.03 2097.76,585.03 2116.84,565.94 U32.21@2152.56,565.94
  Bottom Layer w10: v1(2000,530) 1970.28,559.72 1970.28,790.4 1977.31,797.43 2022.69,797.43 2047.48,772.64 Rz49.2@2070.87,772.64
ACCEL_INT2: P35.9 Rz48.2 U32.20 | length 1089.8
  Top Layer w10: v1(1999.02,738.19) 1999.02,635.83 2048.23,586.61 v2(2048.23,577.76)
  Signal 1 w10: P35.9@1855.12,41.34 1947.28,133.5 1947.28,596.87 1999.02,648.61 v1(1999.02,738.19)
  Bottom Layer w8: v2(2048.23,577.76) 2054.96,571.03 2090.55,571.03 2109.45,552.13 2109.45,550.94 2110.63,550.94 2115.32,546.26 U32.20@2152.56,546.26
  Bottom Layer w10: v1(1999.02,738.19) Rz48.2@1999.02,772.64
ANT_NEG: NT1.2 Rz_N.1 | length 367.8
  Bottom Layer w50: NT1.2@1434.91,35 1590.28,35 Rz_N.1@1740.47,185.2
ANT_POS: NT1.1 Rz_P.1 | length 24031.2
  Top Layer w50: v5(1398.03,538.35) v5(1398.03,456.06) 1459.94,394.16 v5(1703.91,394.16)
  Bottom Layer w50: NT1.1@1375.38,35 272.09,35 35,272.09 35,1812.99 273.62,2051.61 1432.44,2051.61 1623.03,1861.02 1623.03,232.21 1502.05,111.22 300.2,111.22 300.2,113.19 110,303.39 110,1781.26 305.35,1976.61 1392.04,1976.61 1548.03,1820.62 1548.03,265.75 1467.28,185 335,185 185,335 185,1751.61 335,1901.61 1364.6,1901.61 1473.03,1793.18 1473.03,296.85 1436.18,260 371.06,260 260,371.06 260,1714.53 372.09,1826.61 1328.9,1826.61 1398.03,1757.48 v5(1398.03,538.35) v5(1398.03,456.06) ; v5(1703.91,394.16) 1743.9,354.17 Rz_P.1@1743.9,326.61
BATT_FULL: P35.6 Rz22.1 U32.19 | length 1231.8
  Top Layer w10: v2(2072.23,548.03) 2072.23,587.7 2048.23,611.7 2048.23,690.31 2028.54,710 2028.54,877.75 2050.79,900 v1(2130,900)
  Signal 1 w10: P35.6@2005.12,41.34 2001.73,44.72 2001.73,493.55 2027,518.82 2027,530.18 2043.82,547 2082.27,547 2081.25,548.03 v2(2072.23,548.03)
  Bottom Layer w8: v2(2072.23,548.03) 2084.96,548.03 2106.41,526.57 U32.19@2152.56,526.57
  Bottom Layer w10: Rz22.1@2035.43,938.98 2074.41,900 v1(2130,900)
BATT_MEAS: P36.2 Rz41.1 U32.3 | length 1281.8
  Signal 1 w12: P36.2@2555.12,41.34 2570.29,56.51 2570.29,155.29 2610,195 2610,548.98 v1(2772.64,711.61)
  Bottom Layer w10: U32.3@2358.27,379.92 2358.27,345.42 2526.57,177.11 2526.57,69.88 P36.2@2555.12,41.34 ; v1(2772.64,711.61) 2772.64,677.17 Rz41.1@2819.88,629.92
BATT_MEAS_ENABLE: P36.3 Rz40.2 U32.5 | length 765.8
  Signal 1 w12: P36.3@2505.12,41.34 2544.29,80.51 v1(2544.29,271.65)
  Bottom Layer w10: U32.5@2318.9,379.92 2318.9,282.48 2505.12,96.26 P36.3@2505.12,41.34 ; v1(2544.29,271.65) 2544.29,297.24 Rz40.2@2599.41,352.36
BITLINE: BL.0 C10.1 D2.4 D2.5 R1.1 R9.1 Rz1.1 U1.3 | length 966.8
  Top Layer w12: D2.5@3161.42,345.03 D2.4@3187.01,345.03
  Top Layer w20: v1(3067.91,302.17) 3070.75,305.01 3144.15,305.01 3177.73,338.58
  Signal 1 w20: v1(3067.91,302.17) 3235.24,302.17 BL.0@3298.23,234.25
  Bottom Layer w12: U1.3@2834.65,318.9 2834.65,288.46 2813.77,267.59 2813.77,266.18 2812.65,265.05 2813.77,263.92 2813.77,220.6 2822.76,211.61 2959.65,211.61 ; Rz1.1@2959.65,343.5 Rz1.1@2962.6,346.46
  Bottom Layer w20: Rz1.1@2959.65,343.5 R1.1@2959.65,262.8 ; C10.1@2966.54,176.18 2959.65,183.07 2959.65,211.61 R1.1@2959.65,262.8 ; v1(3067.91,302.17) 2999.02,302.17 R1.1@2959.65,262.8
BITLINE_LPF: B_LP.0 C6.1 R1.2 R2.1 Rz2.1 U1.4 | length 790
  Bottom Layer w10: U1.4@2834.65,244.09 2853.35,262.8 R1.2@2904.53,262.8 2925,283.27 2925,355.36 2944.82,375.17 3048.33,375.17 3041.34,382.17 R2.1@3041.34,395.67 ; R2.1@3043.31,385 3072.02,356.28 3276.56,356.28 B_LP.0@3293.31,373.03
  Bottom Layer w12: R2.1@3045.83,397.64 C6.1@3045.83,488.19
  Bottom Layer w15: Rz2.1@2948.82,488.19 C6.1@3045.83,488.19
BL-LPF_T: Rz2.2 U2.3 | length 108.5
  Bottom Layer w12: U2.3@2841.54,546.26 2945.87,546.26 Rz2.2@2948.82,543.31
BL_T: Rz1.2 U2.4 | length 164.4
  Bottom Layer w12: U2.4@2841.54,471.46 2917.32,471.46 2962.6,426.18 Rz1.2@2962.6,401.57
C11M: C71.2 E1.28 | length 198.5
  Bottom Layer w6: 2430.02,1525.94 2539.72,1525.94 2544.29,1530.51 2588.58,1530.51 E1.28@2589.57,1529.53
  Bottom Layer w8: C71.2@2399.61,1519.69 2399.61,1525.93 2430,1525.93
C11P: C71.1 E1.29 | length 201.7
  Bottom Layer w8: C71.1@2399.61,1559.06 2427.17,1559.06 2446.28,1539.94 2480.73,1539.94 2490,1549.21 E1.29@2589.57,1549.21
C12M: C70.1 E1.26 | length 168.6
  Bottom Layer w6: C70.1@2443.86,1503.12 2445.87,1501.11 2445.87,1482.28 2545.28,1482.28 2553.16,1490.16 E1.26@2589.57,1490.16
C12P: C70.2 E1.27 | length 109.1
  Bottom Layer w6: C70.2@2483.23,1503.12 2546.72,1503.12 2553.45,1509.84 E1.27@2589.57,1509.84
C13M: C69.2 E1.24 | length 178
  Bottom Layer w6: C69.2@2411.57,1450.79 E1.24@2589.57,1450.79
C13P: C69.1 E1.25 | length 196.7
  Bottom Layer w6: C69.1@2403.54,1482.8 2416.34,1482.8 2435.35,1463.79 2548.43,1463.79 2555.12,1470.47 E1.25@2589.57,1470.47
C14M: C68.2 E1.22 | length 158.5
  Bottom Layer w6: C68.2@2443.86,1424.12 2465.67,1402.31 2542.07,1402.31 2551.18,1411.42 E1.22@2589.57,1411.42
C14P: C68.1 E1.23 | length 109.2
  Bottom Layer w6: C68.1@2483.23,1424.12 2543.21,1424.12 2550.2,1431.1 E1.23@2589.57,1431.1
C15M: C67.2 E1.20 | length 189.1
  Bottom Layer w6: C67.2@2403.54,1364.64 2410.95,1372.05 E1.20@2589.57,1372.05
C15P: C67.1 E1.21 | length 194.3
  Bottom Layer w6: C67.1@2403.54,1403.8 2419.55,1387.8 2549.21,1387.8 2553.15,1391.73 E1.21@2589.57,1391.73
C16M: C66.2 E1.18 | length 178.5
  Bottom Layer w6: C66.2@2443.86,1346.12 2442.87,1345.13 2442.87,1321.21 2444.98,1319.1 2530.72,1319.1 2544.29,1332.68 E1.18@2589.57,1332.68
C16P: C66.1 E1.19 | length 108.9
  Bottom Layer w6: C66.1@2483.23,1346.12 2546.91,1346.12 2553.15,1352.36 E1.19@2589.57,1352.36
C21M: C65.2 E1.16 | length 189.5
  Bottom Layer w6: C65.2@2403.54,1285.43 2411.42,1293.31 2416.65,1293.31 2416.86,1293.1 2589.36,1293.1 E1.16@2589.57,1293.31
C21P: C65.1 E1.17 | length 197.4
  Bottom Layer w6: C65.1@2403.54,1324.8 2422.24,1306.1 2544.29,1306.1 2552.17,1313.98 2588.58,1313.98 E1.17@2589.57,1312.99
C31M: C64.2 E1.14 | length 163.2
  Bottom Layer w6: C64.2@2443.86,1267.12 2443.86,1258.7 2457.25,1245.31 2540.58,1245.31 2549.21,1253.94 E1.14@2589.57,1253.94
C31P: C64.1 E1.15 | length 109
  Bottom Layer w6: C64.1@2483.23,1267.12 2542.71,1267.12 2549.21,1273.62 E1.15@2589.57,1273.62
C41M: C63.1 E1.13 | length 193.2
  Bottom Layer w6: C63.1@2403.54,1245.8 2404.04,1245.31 2438.87,1245.31 2452.81,1231.37 2586.68,1231.37 E1.13@2589.57,1234.25
C41P: C63.2 E1.12 | length 190.8
  Bottom Layer w6: C63.2@2398.79,1214.57 E1.12@2589.57,1214.57
C42M: C62.2 E1.11 | length 111.7
  Bottom Layer w6: C62.2@2482.24,1184.2 2526.83,1184.2 2537.52,1194.88 E1.11@2589.57,1194.88
C42P: C62.1 E1.10 | length 156.4
  Bottom Layer w6: C62.1@2442.87,1184.2 2459.06,1168.01 2539.07,1168.01 2546.26,1175.2 E1.10@2589.57,1175.2
CONNECT_BATT: Con_Batt.0 Rz0.2 U24.A4 | length 408.1
  Top Layer w8: Rz0.2@3023.62,1915.35 3074.72,1864.25 U24.A4@3106.38,1864.25
  Top Layer w10: Con_Batt.0@2773.62,2046.26 2827.59,2046.26 2958.49,1915.35 Rz0.2@3023.62,1915.35
EN_VREG: C20.2 D21.2 D22.2 EN_reg.0 R21.2 Rz0.1 U23.3 | length 1139.5
  Top Layer w12: v1(2984.25,1853.98) 2990.51,1860.24 Rz0.1@3023.62,1860.24
  Signal 1 w20: v1(2984.25,1853.98) 3020,1818.23 3020,1516.42 v2(3127.95,1408.46) 3127.95,1377.95 EN_reg.0@3282.48,1223.43
  Bottom Layer w12: v2@3020,1701.15 3102.44,1701.15 D22.2@3102.44,1700 3116.03,1700 U23.3@3155.6,1660.43 ; D21.2@3097.83,1397.56 3117.05,1397.56 v2(3127.95,1408.46)
  Bottom Layer w20: C20.2@3087.19,1547.24 3088.67,1545.77 R21.2@3088.67,1486.22 3088.67,1461.33 3127.95,1422.05 v2(3127.95,1408.46)
  other v2: 3020,1701.72
EPD_BUSY: E1.2 U32.25 | length 727.1
  Top Layer w20: v1(2145.57,713.17) 2150.57,708.17 2345.12,708.17 2429.79,792.85 v1(2429.79,844.49)
  Bottom Layer w8: v1(2145.57,713.17) 2169.71,689.04 2181.1,677.64 U32.25@2181.1,653.54 ; v1(2429.79,844.49) 2429.79,926.84 2520.67,1017.72 E1.2@2589.57,1017.72
EPD_DISCHARGE: Q61.1 Q62.1 U32.26 | length 1285
  Top Layer w12: v1(2144.69,1673.23) 2035.99,1564.54 2035.99,1342.24 2088.37,1289.86 2088.37,1011.63 2220,880 2220,792.39 v1(2190.54,762.94)
  Bottom Layer w8: v1(2190.54,762.94) 2200.79,752.69 U32.26@2200.79,653.54
  Bottom Layer w10: Q62.1@2140.75,1775.59 2173.23,1743.11 Q61.1@2173.23,1719.49 2173.23,1701.77 v1(2144.69,1673.23)
EPD_PANEL_ON: U9.4 U32.23 | length 1043.5
  Signal 1 w12: v1(2095,685) 2095,696.54 2081.27,710.27 2081.27,783.68 2182.43,884.84 2182.43,1426.52 v1(2185.91,1430)
  Bottom Layer w8: v1(2095,685) 2125.83,654.17 2125.83,618.57 2139.09,605.31 U32.23@2152.56,605.31 ; v1(2185.91,1430) 2220.3,1464.39 2220.3,1528.18 2229.52,1537.4 U9.4@2242.13,1537.4
EPD_PWM: C77.1 P35.5 U32.18 | length 1380.5
  Top Layer w12: v2@2055.97,519.03 2084.24,519.03 2110,544.79 2110,585 v2(2085,610)
  Top Layer w20: v2(2055,520) v2@2055.97,519.03
  Signal 1 w8: v2(2055,520) v2@2056.81,518.19 ; P35.5@2055.12,41.34 2055.12,54.88 2020,90 2020,475.71 v2@2057.21,512.92
  Signal 1 w12: v2(2085,610) 2092.11,610 2223.43,741.31 v1(2223.43,1142.72)
  Bottom Layer w8: v2@2057.28,517.72 2081.67,517.72 2092.5,506.89 U32.18@2152.56,506.89 ; v1@2227.16,1143.7 2253.73,1117.13 C77.1@2256.89,1117.13
EPD_RESET: E1.7 U32.24 | length 1020.3
  Signal 1 w8: v1(2108.27,721.46) 2108.27,769.05 2198.43,859.21 2198.43,1160.69 2221.71,1183.98 2380,1183.98 v1(2438.98,1125)
  Bottom Layer w8: v1(2108.27,721.46) 2108.27,715.12 2152.56,670.83 U32.24@2152.56,625 ; v1(2438.98,1125) 2502.95,1125 2511.81,1116.14 E1.7@2589.57,1116.14
FEED_NEG: C3.2 Cn1.1 Cn2.1 Cn3.1 D2.3 Q1.2 | length 891.9
  Top Layer w12: 3187.01,239.17 D2.3@3187.01,270.22
  Top Layer w15: Cn3.1@3262.56,970.47 Cn3.1@3267.72,975.39
  Top Layer w25: Q1.2@3193.9,409.45 3237.07,409.45 ; 3220.68,272.84 3242.14,294.3 3242.14,652.37 3262.8,673.03 3262.56,682.09 3262.56,970.47 Cn3.1@3262.8,972.44
  Top Layer w30: C3.2@3154.6,206.69 3187.01,239.1 3187.01,239.17 3220.68,272.84
FEED_POS: C2.2 Cp1.2 Cp2.2 Cp3.2 D2.6 Q2.2 | length 774.4
  Top Layer w12: D2.6@3133.65,345.03 D2.6@3135.83,345.03
  Top Layer w20: Cp2.2@2838.58,710.63 2838.58,795.28 Cp3.2@2839.57,796.26
  Top Layer w25: C2.2@2837.6,492.13 C2.2@2843.5,486.22 Q2.2@2930.63,486.22 ; Q2.2@2930.63,484.25 2970,444.88 2970,399.03 2996,373.03 3016.71,373.03 3044.72,345.03 D2.6@3133.65,345.03
  Top Layer w30: C2.2@2837.6,492.13 Cp1.2@2837.6,574.8 2837.6,795.28
FULL_CHARGED: Q3.1 U25.4 | length 199.5
  Top Layer w12: Q3.1@3116.22,1331.69 3116.22,1359.33 3176.26,1419.37 U25.4@3176.26,1506.34